# Altium PCB BM Dev Cells.PcbDoc
Units mm, origin at the board's own origin, x right, y up, seen from the top; angles counter-clockwise.
Board outline 113.77 x 88.64 mm, 2 copper layers (TOP Copper, BOT Copper), stack 1.544 mm thick; 26 components, 10 nets, 71 pads, 5 vias.
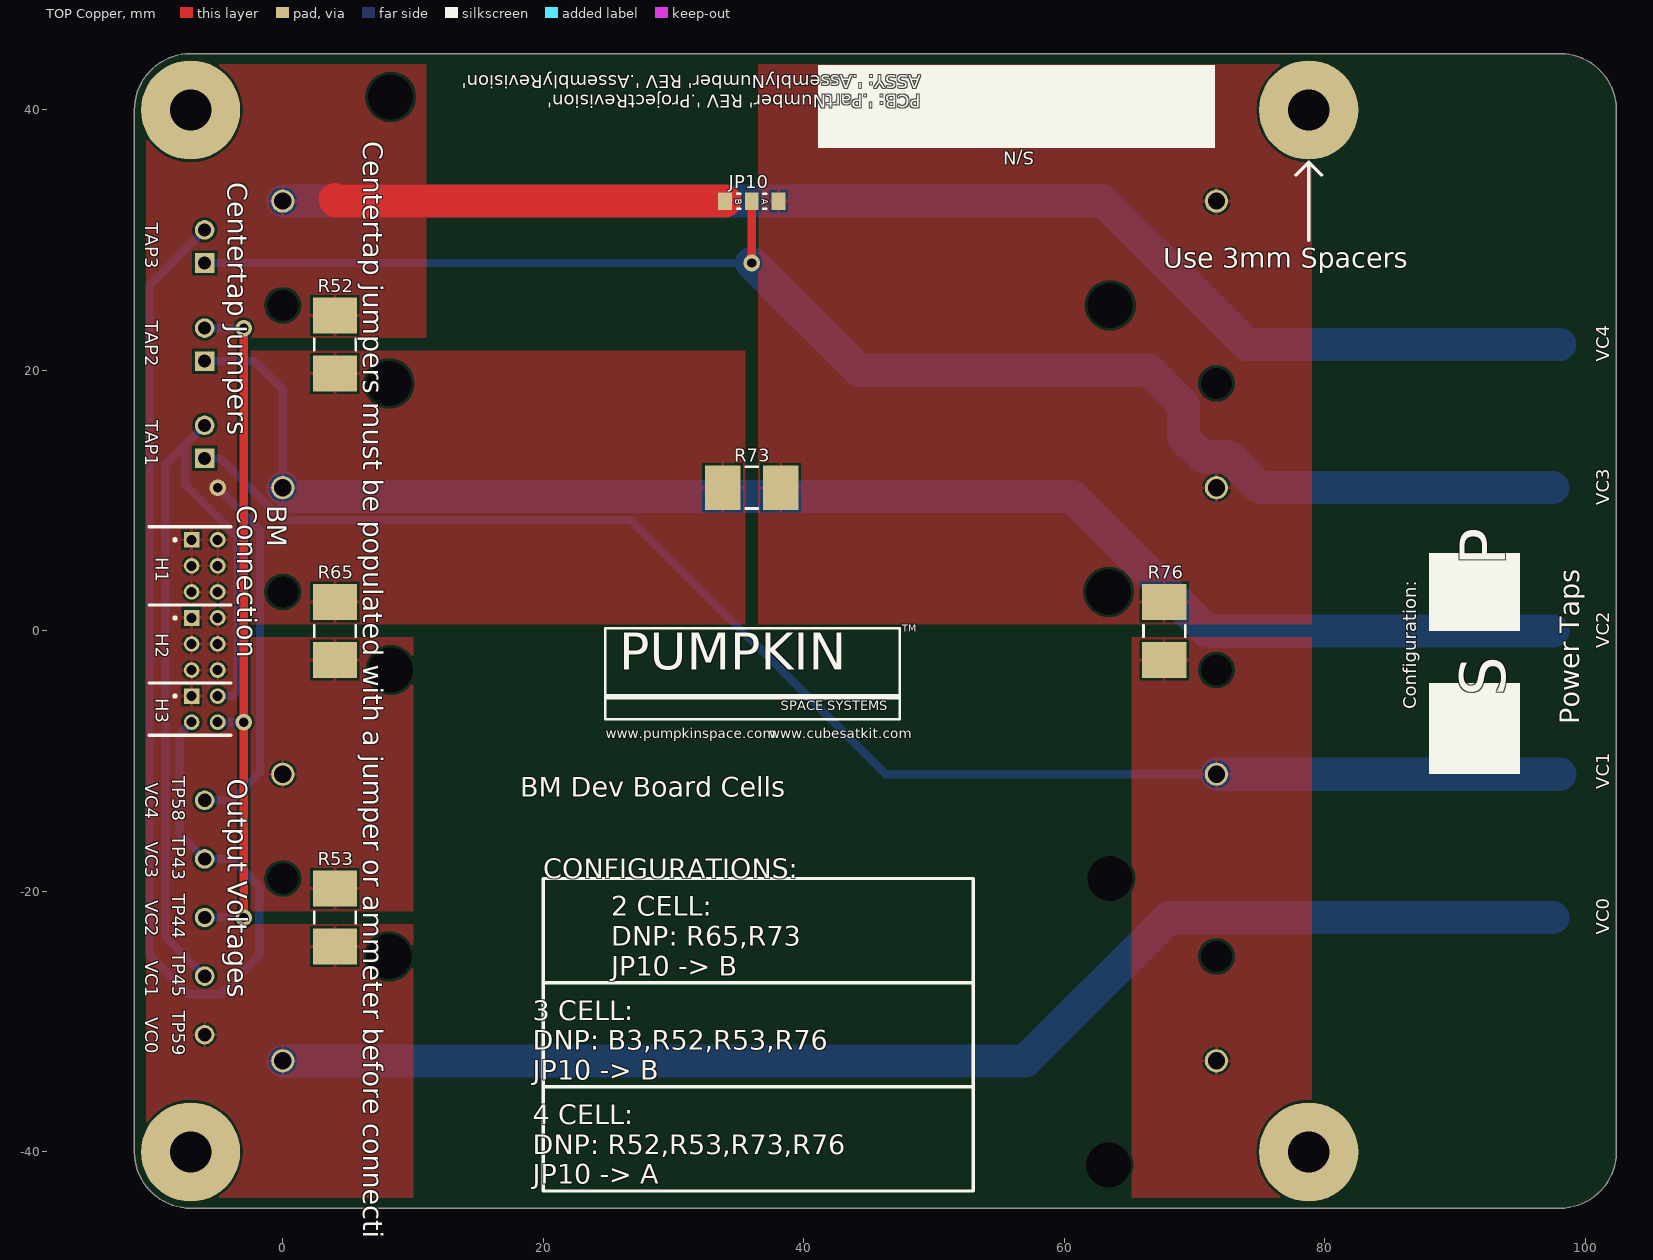
[diagram p0: TOP Copper view]
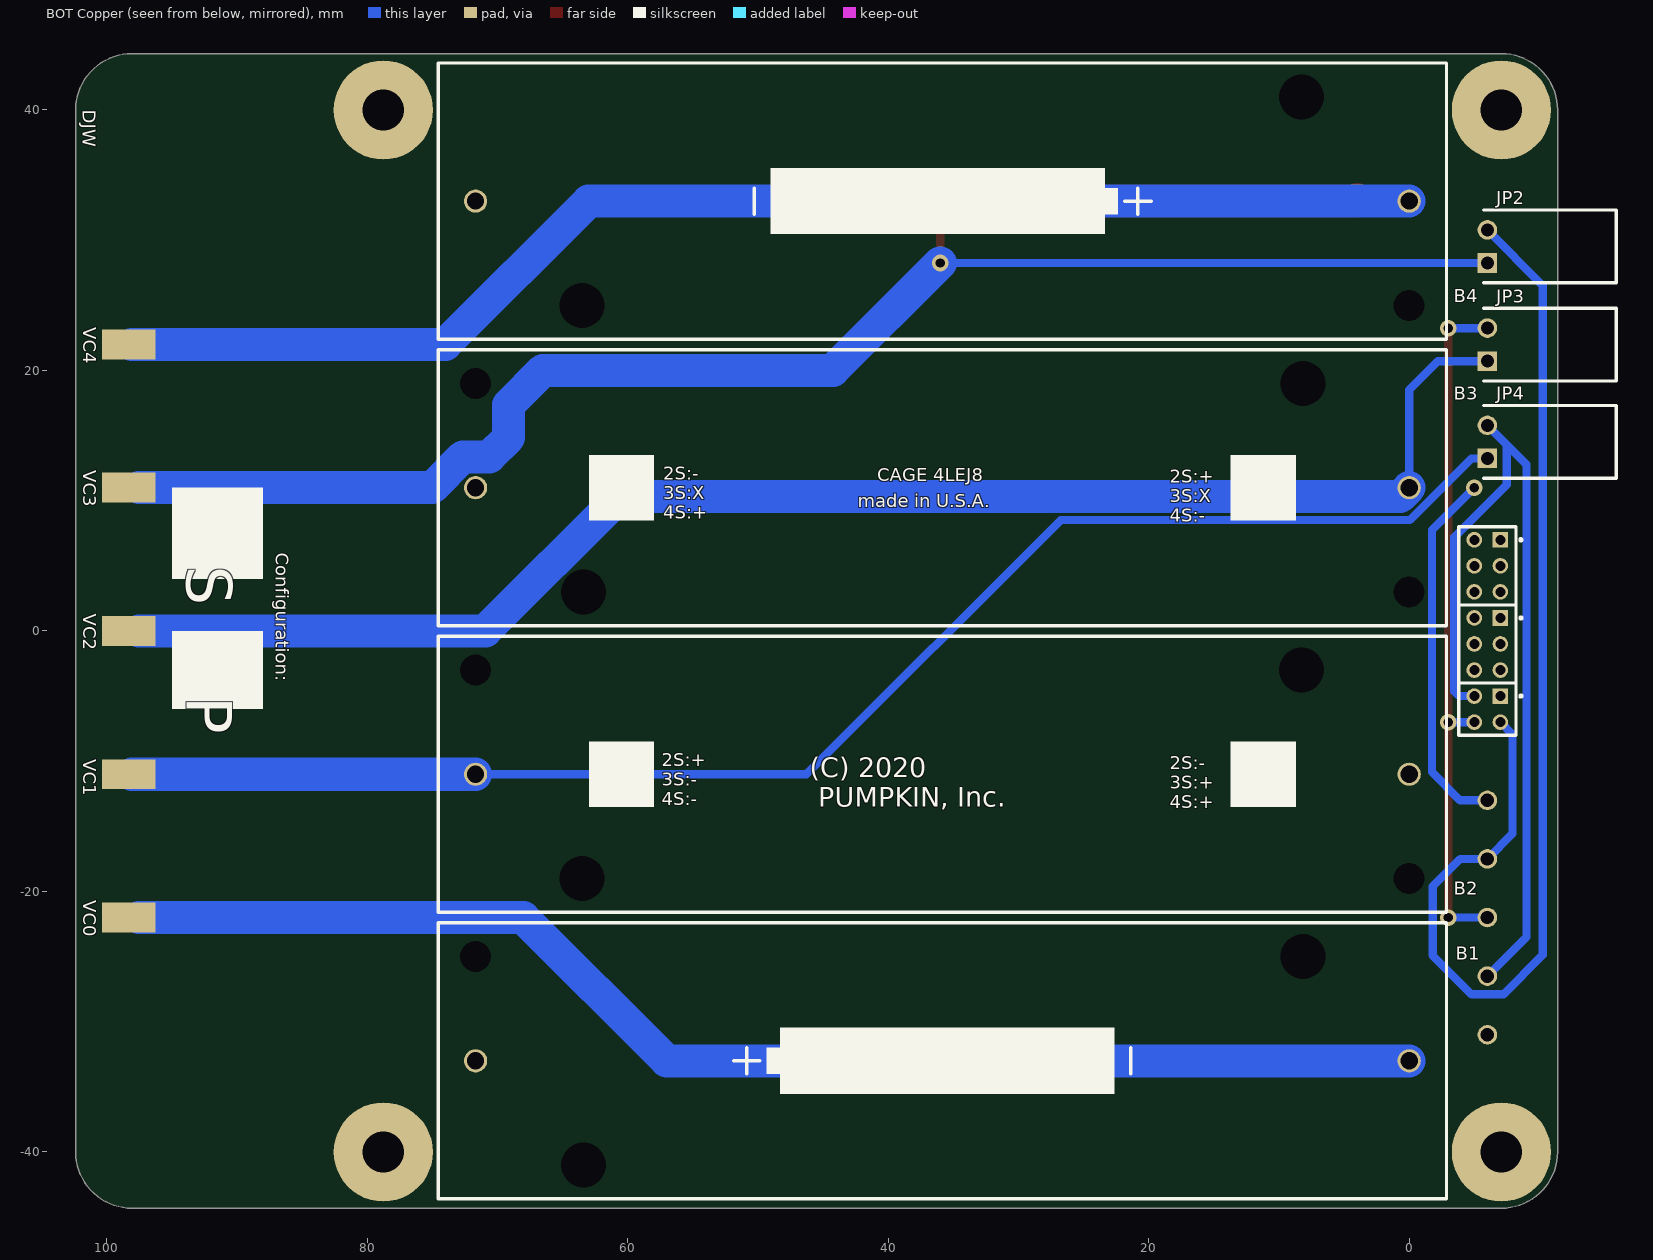
[diagram p1: BOT Copper view, seen from below]
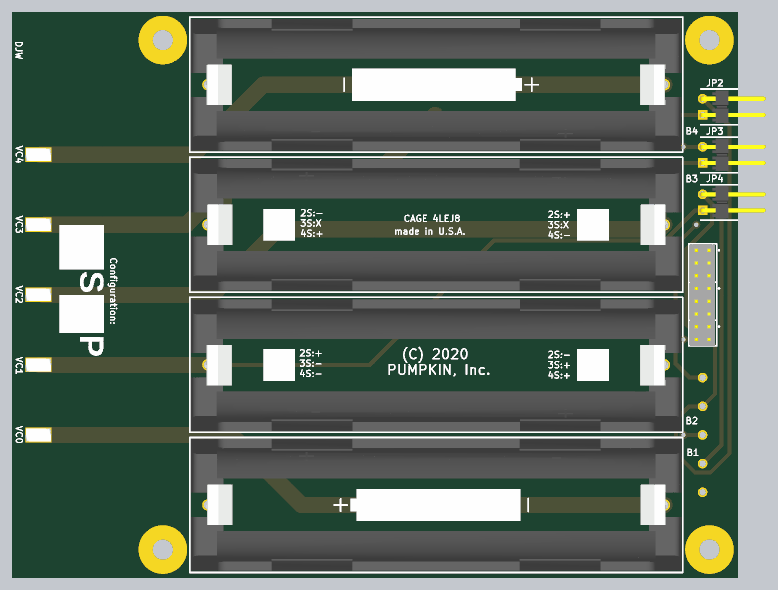
[diagram p2: 3D render of the assembled board from below, using the file's embedded part models]

## Layer stack, top to bottom
Top Solder: solder mask 0.0102, Solder Resist, Dk 3.5
TOP Copper: signal copper 0.0356
Dielectric 3: prepreg 1.4732, Dk 4.2
BOT Copper: signal copper 0.0356
Bottom Solder: solder mask 0.0102, Solder Resist, Dk 3.5

## Board outline
-7.079,-44.318 cw(c-7.079,-40) -11.397,-40 -11.397,40 cw(c-7.079,40) -7.079,44.318 98.058,44.318 cw(c98.058,40) 102.376,40 102.376,-40 cw(c98.058,-40) 98.058,-44.318

## Design rules (kind name [scope] priority, off if disabled: settings)
Clearance Clearance_1 [HasFootprint('Spark_Gap') vs inPolygon] p1: gap=0.203 ignorepadtopadclearanceinfootprint=FALSE except(0: Arc-Hole Track-Hole SMDPad-Hole THPad-Hole Via-Hole Fill-Hole Poly-Hole Region-Hole Text-Hole)
Clearance Clearance_3 [HasFootprint('Spark_Gap')] p2: gap=0.152 ignorepadtopadclearanceinfootprint=FALSE except(0: Arc-Hole Track-Hole SMDPad-Hole THPad-Hole Via-Hole Fill-Hole Poly-Hole Region-Hole Text-Hole)
Clearance Clearance_2 [InNet('BAT_POS')   and not      HasFootprint('Spark_Gap')] p3: gap=0.203 ignorepadtopadclearanceinfootprint=FALSE except(0: Arc-Hole Track-Hole SMDPad-Hole THPad-Hole Via-Hole Fill-Hole Poly-Hole Region-Hole Text-Hole)
Clearance Polygon_Clearence [All vs OnLayer('Keep-Out Layer')] p4: gap=0.254 ignorepadtopadclearanceinfootprint=FALSE except(0: Arc-Hole Track-Hole SMDPad-Hole THPad-Hole Via-Hole Fill-Hole Poly-Hole Region-Hole Text-Hole)
Clearance [All] p5: gap=0.203 ignorepadtopadclearanceinfootprint=FALSE except(0: Arc-Hole Track-Hole SMDPad-Hole THPad-Hole Via-Hole Fill-Hole Poly-Hole Region-Hole Text-Hole)
ComponentClearance ComponentClearance_MTMM [HasFootprint('MTMM-103-03-S-D-243') vs HasFootprint('MTMM-102-02-S-D-196')] p1: gap=0 collisioncheckmode=3 verticalgap=0.254 showdistances=FALSE
ComponentClearance [All] p2: gap=0.254 collisioncheckmode=3 verticalgap=0.05 showdistances=FALSE
HoleSize [All] p1: absolutevalues=TRUE maxlimit=8 minlimit=0.025 maxpercent=80.000 minpercent=20.000
MinimumSolderMaskSliver [All] p1: minsoldermaskwidth=0.152
PolygonConnect PolygonConnect_1 [(InPadClass('Power'))or isVia   or HasFootprint('Spark_Gap')] p1: connectstyle=Direct reliefconductorwidth=0.254 reliefentries=4 polygonreliefangle="90 Angle" airgapwidth=0.254
PolygonConnect [All] p2: connectstyle=Relief reliefconductorwidth=0.254 reliefentries=4 polygonreliefangle="90 Angle" airgapwidth=0.18
RoutingVias [All] p1: holewidth=0.2 width=0.5 viastyle="Through Hole" minholewidth=0.127 minwidth=0.4 maxholewidth=6 maxwidth=8
SilkToSilkClearance [All] p1: silktosilkclearance=0
SilkToSolderMaskClearance [IsPad] p1: minsilkscreentomaskgap=0 clearancetoexposedcopper=TRUE
SolderMaskExpansion [All] p1: expansion=0 istentingtop=FALSE
Width [All] p1: maxlimit=2.54 minlimit=0.203 preferedwidth=0.254 minimp=50.000000 maximp=50.000000 favimp=50.000000
25 further rules are at their usual default settings.

## Components (designator, comment, footprint, x,y, rotation, side; value= is the part's Value field where it differs from the comment)
B1 "1043" 1043 35.839,-33 r270 bottom
B2 "1043" "1043 - non-polar" 35.839,-11 r90 bottom
B3 "1043" "1043 - non-polar" 35.839,11 r270 bottom
B4 "1043" 1043 35.839,33 r90 bottom
H1 "MTMM-103-03-S-D-243" MTMM-103-03-S-D-243 -6,5 r0 top
H2 "MTMM-103-03-S-D-243" MTMM-103-03-S-D-243 -6,-1 r0 top
H3 "MTMM-102-02-S-D-196" MTMM-102-02-S-D-196 -6,-6 r0 top
JP2 "TSW-102-08-L-S-RA" HDR1X2HTH -6,29.52 r90 bottom
JP3 "TSW-102-08-L-S-RA" HDR1X2HTH -6,21.98 r90 bottom
JP4 "TSW-102-08-L-S-RA" HDR1X2HTH -6,14.52 r90 bottom
JP10 "Jumper" "0805 RES 2 way jumper" 37.025,33 r180 top
R52 "0R" "2512 RES" 4,22 r270 top
R53 "0R" "2512 RES" 4,-22 r90 top
R65 "0R" "2512 RES" 4,0 r90 top
R73 "0R" "2512 RES" 36,11 r180 top
R76 "0R" "2512 RES" 67.679,0 r90 top
TP43 "Testpoint" Testpoint -6,-17.5 r90 top
TP44 "Testpoint" Testpoint -6,-22 r90 top
TP45 "Testpoint" Testpoint -6,-26.5 r90 top
TP58 "Testpoint" Testpoint -6,-13 r90 top
TP59 "Testpoint" Testpoint -6,-31 r90 top
VC0 "Hook" Hook 98.3,-22 r344 bottom
VC1 "Hook" Hook 98.3,-11 r344 bottom
VC2 "Hook" Hook 98.3,0 r344 bottom
VC3 "Hook" Hook 98.3,11 r344 bottom
VC4 "Hook" Hook 98.3,22 r344 bottom

## Footprints (in the part's own frame and the unit in brackets; to place one, negate y for a bottom-side part, rotate by r counter-clockwise, add the part's x,y. Pads: shape width x height; smd on the part's side, far side on the other; paste and mask are expansions set on the pad)
"0805 RES 2 way jumper" [mm] "Chip Resistor, 2-Leads, Body 2.05x1.25mm, IPC Medium Density"
  rect 1.05x1.35 smd: 1(-1.025,0) 2(1.025,0) 3(3.075,0)
  silkscreen extent -0.07,-0.58 2.13,0.58
1043 [mil]
  round 70 hole 52: 1(0,-1411) 2(0,1411)
  round 39.37 hole 94 unplated: NC(-315,-1411)
  round 39.37 hole 136 unplated: NC(-315,1090) NC(315,-1085)
  silkscreen extent -417,-1524 417,1524, body extent -408,-1516 405,1518, height 587
"1043 - non-polar" [mil]
  round 70 hole 52: 1(0,-1411) 2(0,1411)
  round 39.37 hole 94: NC(-315,-1411) NC(315,1411)
  round 39.37 hole 136: NC(-315,1090) NC(315,-1085)
  silkscreen extent -417,-1524 417,1524, body extent -408,-1516 405,1518, height 587
"2512 RES" [mm] "Chip Resistor, 2-Leads, Body 6.30x3.20mm, IPC Medium Density"
  rect 2.75x3.4 smd paste-2: 1(-2.225,0) 2(2.225,0)
  silkscreen extent -0.45,-1.6 0.45,1.6, body extent -3.25,-1.7 3.25,1.7, height 0.8
HDR1X2HTH [mm] "Connector; Header; 3 Position; Right Angle. Through hole"
  rect 1.5x1.5 hole 1: 1(-1.27,0)
  round 1.5 hole 1: 2(1.27,0)
  silkscreen extent -2.79,-9.9 2.79,0.3, body extent -2.54,-9.91 2.54,0.32, height 3.07
Hook [mm]
  rect 4.1x2.3 smd rot 164 paste-0.3: 1(0,0)
  body extent -2.24,-1.52 2.25,1.53, height 2.3
MTMM-102-02-S-D-196 [mm]
  rect 1.2x1.2 hole 0.762: 1(-1,1)
  round 1.2 hole 0.762: 2(1,1) 3(-1,-1) 4(1,-1)
  silkscreen extent -2.38,0.9 -2.18,1.1, body extent -1.97,-2 1.97,2, height 1.55
MTMM-103-03-S-D-243 [mm]
  rect 1.2x1.2 hole 0.762: 1(-1,2)
  round 1.2 hole 0.762: 2(1,2) 3(-1,0) 4(1,0) 5(-1,-2) 6(1,-2)
  silkscreen extent -2.38,1.9 -2.18,2.1, body extent -1.97,-3 1.97,3, height 1.55
Testpoint [mm]
  round 1.5 hole 1.02: 1(0,0)

## Part data
B1 B2 B3 B4: "Battery 18650 Holder", Supplier Part Number 1=36-1043-ND, Supplier 1=Digi-Key, Supplier 2=Mouser, Supplier Part Number 2=534-1043
H1 H2: "Header 3x2 TH thru-board 2mm", Supplier Part Number 1=MTMM-103-03-G-D-243-ND, Supplier 1=Digi-Key, Supplier 2=Digi-Key, Supplier Part Number 2=MTMM-103-03-G-D-000-ND
H3: "Header 2x2 TH thru-board 2mm", Supplier Part Number 1=MTMM-102-02-S-D-196-ND, Supplier 1=Digi-Key, Supplier 2=Digi-Key, Supplier Part Number 2=MTMM-102-02-G-D-196-ND
JP2 JP3 JP4: "Header 2x1 RA TH", Supplier Part Number 1=SAM1043-02-ND, Supplier 1=Digi-Key, Supplier 2=Digi-Key, Supplier 3=Digi-Key, Supplier 4=Digi-Key, Supplier Part Number 2=SAM10325-ND, Supplier Part Number 3=HTSW-102-08-G-S-RA-ND, Supplier Part Number 4=SAM1039-02-ND
JP10: library part "Jumper 2 way 0805", "Jumper 0805 2 pos", Supplier Part Number 1=P0.0ACT-ND, Supplier 1=Digi-Key, Supplier 2=Digi-Key, Supplier Part Number 2=311-0.0CRCT-ND
R52 R53 R65 R73 R76: library part "Resistor 0R 2512", "Resistor 0R 2512 1W", Supplier Part Number 1=YAG1232CT-ND, Revision="Altium ETH 11-03.2008", Supplier 1=Digi-Key, Supplier 2=Digi-Key, Supplier 3=Digi-Key, Supplier Part Number 2=RMCF2512ZT0R00CT-ND, Supplier Part Number 3=1276-6000-1-ND
TP43 TP44 TP45 TP58 TP59: Supplier Part Number 1=36-5002-ND, Supplier 1=Digi-Key, Supplier 2=Digi-Key, Supplier Part Number 2=36-5001-ND
VC0 VC1 VC2 VC3 VC4: "Testpoint Hook", Manufacturer="Keystone Electronics", Manufacturer Part Number=5016, Supplier Part Number 1=36-5016CT-ND, Supplier 1=Digi-Key, Supplier 1 Pricing="0.60 (NZD)", Supplier 2=Digi-Key, Supplier Part Number 2=36-5018CT-ND

## Free pads (board coordinates)
  round 7.62 hole 3.175: ""(-7.079,-40) ""(-7.079,40) ""(78.758,-40) ""(78.758,40)

## Via types
v1: diameter 1.27, hole 0.711, TOP Copper to BOT Copper, tented both sides, 5 vias

## Nets (pads, with @x,y where several pads share a name; then routed paths per layer and width w, separated by ;. In a path a pad name is that pad's centre, name@x,y a point inside that pad or via, vN(x,y) a via of type N, cw(c..) or ccw(c..) an arc to the next point about the centre after c; other vN are vias at no path point)
CELL_TAP_1: B1.1 B2.2 JP4.1 R76.1 VC1.1 | length 114.1
  BOT Copper w0.635: JP4.1 -4.782,13.25 -0.051,8.519 26.746,8.519 46.265,-11 B2.2
  BOT Copper w2.54: B2.2 VC1.1@98.058,-11
CELL_TAP_2: B3.2 JP3.1 R52.2 R65.2 R73.2 VC2.1 | length 116.5
  BOT Copper w0.635: JP3.1 -2.21,20.71 0,18.5 B3.2
  BOT Copper w2.54: B3.2 0.69,10.31 60.614,10.31 70.923,0 VC2.1@97.52,0
CELL_TAP_3: JP2.1 JP10.2 VC3.1 | length 116.9
  TOP Copper w0.635: v1(36,28.25) JP10.2
  BOT Copper w0.635: JP2.1 v1(36,28.25)
  BOT Copper w2.54: v1(36,28.25) 44.25,20 66.5,20 69.139,17.361 69.139,14.85 70.627,13.362 72.657,13.362 75.019,11 VC3.1@97.52,11
NetB2_1: B2.1 R53.2 R65.1
NetB3_1: B3.1 B4.2 JP10.1 R73.1 R76.2
VC_0: B1.2 H2.1 H2.2 H2.3 H2.4 H2.5 H2.6 H3.1 R53.1 TP59.1 VC0.1 | length 102.1
  BOT Copper w2.54: B1.2 57,-33 68,-22 VC0.1@97.52,-22
VC_1: H3.2 JP4.2 TP45.1 | length 67.1
  BOT Copper w0.635: TP45.1 -9,-23.5 -9,12.79 -7.5,14.29 ; JP4.2 -7.5,14.29 ; H3.2 -3.827,-5 -3.455,-4.628 -3.455,7.185 -7.5,11.231 -7.5,14.29
VC_2: H3.4 JP3.2 TP44.1 | length 53.3
  TOP Copper w0.635: v1(-3,-22) v1(-3,-7) v1(-3,23.25)
  BOT Copper w0.635: TP44.1 v1(-3,-22) ; JP3.2 v1(-3,23.25) ; H3.4 v1(-3,-7)
VC_3: H3.3 JP2.2 TP43.1 | length 90.4
  BOT Copper w0.635: H3.3 -7.937,-7.937 -7.937,-15.563 TP43.1 -3.919,-17.5 -1.8,-19.619 -1.8,-24.9 -4.8,-27.9 -7.234,-27.9 -10.25,-24.884 -10.25,26.54 JP2.2
VC_4: B4.1 H1.1 H1.2 H1.3 H1.4 H1.5 H1.6 JP10.3 R52.1 TP58.1 VC4.1 | length 160.9
  TOP Copper w2.54: 4,33.127 4.127,33 JP10.3
  BOT Copper w0.635: TP58.1 -3.919,-13 -1.752,-10.833 -1.752,7.752 v1(-5,11)
  BOT Copper w2.54: B4.1 63,33 74,22 VC4.1@98.058,22
pads on no net: B1.NC B2.NC B3.NC B4.NC

## Polygon pours and split planes (outlines as drawn)
VC_4 on TOP Copper "TOP_COPPER_VC_4_P006" (solid, pour order 6): 11,22.5 11,43.5 -10.5,43.5 -10.5,2.092 -3.5,2.092 -3.5,22.5
VC_0 on TOP Copper "TOP_COPPER_VC_0_P005" (solid, pour order 5): 10,-22.5 10,-43.5 -10.5,-43.5 -10.5,1.9 -3.5,1.9 -3.5,-22.5
CELL_TAP_1 on TOP Copper "TOP_COPPER_CELL_TAP_1_P003" (solid, pour order 3): 79,-43.5 65.179,-43.5 65.179,-0.5 79,-0.5
NetB3_1 on TOP Copper "TOP_COPPER_NETB3_1_P002" (solid, pour order 2): 79,0.5 36.5,0.5 36.5,43.5 79,43.5
CELL_TAP_2 on TOP Copper "TOP_COPPER_CELL_TAP_2_P001" (solid, pour order 1): -2.5,21.5 35.5,21.5 35.5,0.5 -2.5,0.5
NetB2_1 on TOP Copper "TOP_COPPER_NETB2_1_P000" (solid, pour order 0): -2.5,-0.5 10,-0.5 10,-21.5 -2.5,-21.5

## Other copper
TOP Copper:
  text "Layer 1 (TOP)" at 167.055,-59.64 h5
BOT Copper:
  text "Layer 2 (BOTTOM)" at 166.987,-59.68 h5

## Silkscreen, mask and mechanical layers (free items; w line width, h text height)
Top Overlay:
  region: 95,6 88,6 88,0 95,0
  region: 95,-4 88,-4 88,-11 95,-11
  region: 41.094,43.44 41.094,37.09 71.574,37.09 71.574,43.44
  lines w0.203: 24.756,-5.145 47.362,-5.145 ; 24.756,-4.942 47.362,-4.942 ; 24.756,-6.771 47.362,-6.771 47.362,0.214 24.756,0.214 24.756,-6.771
  lines w0.254: -10.25,-8 -4,-8 ; -10.25,-4 -4,-4 ; -10.25,2 -4,2 ; -10.25,8 -4,8 ; 20,-35 53,-35 ; 20,-26.999 53,-26.999 ; 77.758,35 78.758,36 ; 78.758,30 78.758,36 ; 79.758,35 78.758,36 ; 53,-27 53,-26.999 ; 20,-43 20,-19 53,-19 53,-43 20,-43
  text "PCB: '.PartNumber' REV '.ProjectRevision' / ASSY: '.AssemblyNumber' REV '.AssemblyRevision'" at 48.99,42.662 h1 r180
  text "Centertap jumpers must be populated with a jumper or ammeter before connecting Dev Board" at 6.182,37.6 h1.52 r270
  text "S/N" at 57.692,36.807 h1 r180
  text "Centertap Jumpers" at -4.238,34.442 h1.52 r270
  text "TAP3" at -10.55,31.333 h1 r270
  text "Use 3mm Spacers" at 67.601,27.892 h1.52
  text "TAP2" at -10.55,23.833 h1 r270
  text "VC4" at 101.85,20.667 h1 r90
  text "TAP1" at -10.55,16.166 h1 r270
  text "VC3" at 101.85,9.667 h1 r90
  text "BM / Connection" at -3.5,9.649 h1.52 r270
  text "P" at 95,5 h6 r90
  text "TM" at 47.575,-0.265 h0.89
  text "VC2" at 101.85,-1.333 h1 r90
  text "PUMPKIN" at 25.848,-3.9 h4.83
  text "S" at 95,-5 h6 r90
  text "Configuration:" at 87,-6 h1 r90
  text "SPACE SYSTEMS" at 38.218,-6.364 h1.27
  text "Power Taps" at 99.538,-7.149 h1.52 r90
  text "www.pumpkinspace.com" at 24.781,-8.218 h0.76
  text "www.cubesatkit.com" at 37.329,-8.218 h0.76
  text "Output Voltages" at -4.238,-11.335 h1.52 r270
  text "VC4" at -10.55,-11.667 h1 r270
  text "VC1" at 101.85,-12.166 h1 r90
  text "BM Dev Board Cells" at 18.21,-12.722 h1.52
  text "VC3" at -10.55,-16.167 h1 r270
  text "CONFIGURATIONS:" at 20,-19 h1.52
  text "VC2" at -10.55,-20.667 h1 r270
  text "VC0" at 101.85,-23.333 h1 r90
  text "VC1" at -10.55,-25.334 h1 r270
  text "2 CELL: / DNP: R65,R73 / JP10 -> B" at 25.203,-26.454 h1.52
  text "VC0" at -10.55,-29.667 h1 r270
  text "3 CELL: / DNP: B3,R52,R53,R76 / JP10 -> B" at 19.203,-34.454 h1.52
  text "4 CELL: / DNP: R52,R53,R73,R76 / JP10 -> A" at 19.203,-42.454 h1.52
  text "Top Silkscreen" at 166.987,-59.68 h5
Bottom Overlay:
  region: 95,11 88,11 88,4 95,4
  region: 95,0 88,0 88,-6 95,-6
  text "DJW" at 101.85,40 h1 r90
  text "CAGE 4LEJ8" at 40.832,11.5 h1
  text "made in U.S.A." at 42.331,9.5 h1
  text "2S:- / 3S:X / 4S:+" at 57.25,8.621 h1
  text "2S:+ / 3S:X / 4S:-" at 18.399,8.371 h1
  text "Configuration:" at 87,6 h1 r90
  text "S" at 95,5 h6 r90
  text "P" at 95,-5 h6 r90
  text "2S:+ / 3S:- / 4S:-" at 57.399,-13.379 h1
  text "(C) 2020 /  PUMPKIN, Inc." at 46.03,-13.514 h1.52
  text "2S:- / 3S:+ / 4S:+" at 18.399,-13.629 h1
  text "Bottom Silkscreen" at 42.527,-59.68 h5
Top Paste:
  text "Top Solder Paste" at 166.987,-59.68 h5
Bottom Paste:
  text "Bottom Solder Paste" at 166.987,-59.68 h5
Top Solder:
  text "Top Soldermask" at 166.987,-64.76 h5
Bottom Solder:
  text "Bottom Soldermask" at 42.527,-64.76 h5
  text "Bottom Soldermask" at 166.987,-64.76 h5
Board:
  the board outline again, w0.254
Fab Notes:
  text "FABRICATION NOTES: / ---------------------------------------------------- / 1.  ALL DIMENSIONS IN INCHES / 2.  SCALE IS 1:1 / 4.  SMOBC BOTH SIDES. COLOR: GREEN / 5.  SOLDERMASK IS LPI, SEMI-GLOSS FINISH / 6.  SILKSCREEN LEGEND WHITE / 7.  SILKSCREEN TOP AND BOTTOM / 8.  FINAL BOARD THICKNESS = 0.062\" / 9.  FINAL COPPER THICKNESS = 1oz / 10. 2 CIRCUIT LAYERS / 11. MINIMUM SPACING 0.007\" / 12. MINIMUM SMD PITCH IS 0.020\" / 13. SURFACEMOUNT  COMPONENTS TOP AND BOTTOM / 14. DO NOT ADD TOOLING HOLES / 16. NUMBER OF SMD PADS: 18 / 17. NUMBER OF HOLES: '.Hole_Count' / 18. SMALLEST HOLE IS 0.3mm" at 120.561,-29.453 h4
  text "Mechanical Drawing" at 166.987,-59.68 h5
Rigid PCB Outline:
  text "Rigid PCB Outline" at 166.987,-59.68 h5
Flex PCB Outline:
  text "Flex PCB Outline" at 167,-59.75 h5
Drill Drawing:
  circle w0.254: c-10.815,92.365 r0.847
  lines w0.254: -11.662,76.702 -11.238,76.702 -11.238,76.278 -10.392,76.278 -10.392,76.702 -9.968,76.702 -9.968,77.548 -10.392,77.548 -10.392,77.972 -11.238,77.972 -11.238,77.548 -11.662,77.548 -11.662,76.702 ; -11.662,81.782 -9.968,81.782 -10.815,80.088 -11.662,81.782 ; -11.662,87.708 -10.815,88.132 -9.968,87.708 -10.392,88.555 -9.968,89.402 -10.815,88.978 -11.662,89.402 -11.238,88.555 -11.662,87.708 ; -11.662,95.752 -11.238,95.752 -10.815,95.328 -10.392,95.752 -9.968,95.752 -10.392,96.175 -9.968,96.598 -10.392,96.598 -10.815,97.022 -11.238,96.598 -11.662,96.598 -11.238,96.175 -11.662,95.752 ; -11.662,102.948 -9.968,102.948 -9.968,104.642 -11.662,104.642 -11.662,102.948 ; -11.662,106.758 -11.662,107.182 -11.238,107.605 -11.662,108.028 -11.662,108.452 -11.238,108.452 -10.815,108.028 -10.392,108.452 -9.968,108.452 -9.968,108.028 -10.392,107.605 -9.968,107.182 -9.968,106.758 -10.392,106.758 -10.815,107.182 -11.238,106.758 -11.662,106.758 ; -11.662,111.415 -10.815,110.568 -9.968,111.415 -10.815,112.262 -11.662,111.415
  lines w0.381: -13.181,75.135 129.173,75.135 ; -13.181,113.235 129.173,113.235 ; 0.812,71.325 0.812,117.045 ; 14.524,71.325 14.524,117.045 ; 43.726,71.325 43.726,117.045 ; 56.575,71.325 56.575,117.045 ; 75.213,71.325 75.213,117.045 ; 97.204,71.325 97.204,117.045 ; -13.181,71.325 129.173,71.325 129.173,117.045 -13.181,117.045 -13.181,71.325
  text "Symbol" at -10.895,114.378 h1.83
  text "Count" at 1.955,114.378 h1.83
  text "Hole Size" at 15.667,114.378 h1.83
  text "Plated" at 44.869,114.378 h1.83
  text "Hole Type" at 57.718,114.378 h1.83
  text "Hole Length" at 76.356,114.378 h1.83
  text "Rout Path Length" at 98.347,114.378 h1.83
  text "5" at 1.955,110.568 h1.52
  text "28.00mil (0.711mm)" at 15.667,110.568 h1.52
  text "PTH" at 44.869,110.568 h1.52
  text "Round" at 57.718,110.568 h1.52
  text "-" at 76.356,110.568 h1.52
  text "-" at 98.347,110.568 h1.52
  text "16" at 1.955,106.758 h1.52
  text "30.00mil (0.762mm)" at 15.667,106.758 h1.52
  text "PTH" at 44.869,106.758 h1.52
  text "Round" at 57.718,106.758 h1.52
  text "-" at 76.356,106.758 h1.52
  text "-" at 98.347,106.758 h1.52
  text "6" at 1.955,102.948 h1.52
  text "39.37mil (1.000mm)" at 15.667,102.948 h1.52
  text "PTH" at 44.869,102.948 h1.52
  text "Round" at 57.718,102.948 h1.52
  text "-" at 76.356,102.948 h1.52
  text "-" at 98.347,102.948 h1.52
  text "5" at 1.955,99.138 h1.52
  text "40.16mil (1.020mm)" at 15.667,99.138 h1.52
  text "PTH" at 44.869,99.138 h1.52
  text "Round" at 57.718,99.138 h1.52
  text "-" at 76.356,99.138 h1.52
  text "-" at 98.347,99.138 h1.52
  text "P" at -11.633,98.885 h1.69
  text "8" at 1.955,95.328 h1.52
  text "52.00mil (1.321mm)" at 15.667,95.328 h1.52
  text "PTH" at 44.869,95.328 h1.52
  text "Round" at 57.718,95.328 h1.52
  text "-" at 76.356,95.328 h1.52
  text "-" at 98.347,95.328 h1.52
  text "2" at 1.955,91.518 h1.52
  text "94.00mil (2.388mm)" at 15.667,91.518 h1.52
  text "NPTH" at 44.869,91.518 h1.52
  text "Round" at 57.718,91.518 h1.52
  text "-" at 76.356,91.518 h1.52
  text "-" at 98.347,91.518 h1.52
  text "4" at 1.955,87.708 h1.52
  text "94.00mil (2.388mm)" at 15.667,87.708 h1.52
  text "PTH" at 44.869,87.708 h1.52
  text "Round" at 57.718,87.708 h1.52
  text "-" at 76.356,87.708 h1.52
  text "-" at 98.347,87.708 h1.52
  text "4" at 1.955,83.898 h1.52
  text "125.00mil (3.175mm)" at 15.667,83.898 h1.52
  text "PTH" at 44.869,83.898 h1.52
  text "Round" at 57.718,83.898 h1.52
  text "-" at 76.356,83.898 h1.52
  text "-" at 98.347,83.898 h1.52
  text "T" at -11.633,83.645 h1.69
  text "4" at 1.955,80.088 h1.52
  text "136.00mil (3.454mm)" at 15.667,80.088 h1.52
  text "NPTH" at 44.869,80.088 h1.52
  text "Round" at 57.718,80.088 h1.52
  text "-" at 76.356,80.088 h1.52
  text "-" at 98.347,80.088 h1.52
  text "4" at 1.955,76.278 h1.52
  text "136.00mil (3.454mm)" at 15.667,76.278 h1.52
  text "PTH" at 44.869,76.278 h1.52
  text "Round" at 57.718,76.278 h1.52
  text "-" at 76.356,76.278 h1.52
  text "-" at 98.347,76.278 h1.52
  text "58 Total" at 1.955,72.468 h1.52
  text "Drill Drawing" at 166.987,-64.76 h5
Title Block:
  lines w0.203: 103.246,-57.226 125.852,-57.226 ; 103.246,-57.023 125.852,-57.023 ; 103.246,-58.852 103.246,-51.867 125.852,-51.867 125.852,-58.852 103.246,-58.852
  lines w0.254: 131.427,-67.3 131.427,-46.98 238.107,-46.98 ; 131.427,-54.6 238.107,-54.6 ; 161.907,-67.3 161.907,-46.98 ; -28.593,-67.3 238.107,-67.3 238.107,135.9 -28.593,135.9 -28.593,-67.3
  text "Part Number" at 133.967,-52.06 h5
  text "'.PartNumber''.ProjectRevision'" at 166.987,-52.06 h5
  text "TM" at 126.065,-52.347 h0.89
  text "PUMPKIN" at 104.338,-55.982 h4.83
  text "SPACE SYSTEMS" at 116.708,-58.445 h1.27
  text "Layers:" at 133.967,-59.68 h5
  text "www.pumpkinspace.com" at 103.271,-60.3 h0.76
  text "www.cubesatkit.com" at 115.819,-60.3 h0.76
Title Block Flipped:
  lines w0.203: 83.663,-57.226 106.269,-57.226 ; 83.663,-57.023 106.269,-57.023 ; 83.663,-58.852 83.663,-51.867 106.269,-51.867 106.269,-58.852 83.663,-58.852
  lines w0.254: -28.593,-54.6 78.087,-54.6 ; -28.593,-46.98 78.087,-46.98 78.087,-67.3 ; 47.607,-67.3 47.607,-46.98 ; -28.593,-67.3 238.107,-67.3 238.107,135.9 -28.593,135.9 -28.593,-67.3
  text "'.PartNumber''.ProjectRevision'" at 42.527,-52.06 h5
  text "Part Number" at 75.547,-52.06 h5
  text "TM" at 83.45,-52.347 h0.89
  text "PUMPKIN" at 105.177,-55.982 h4.83
  text "SPACE SYSTEMS" at 92.807,-58.445 h1.27
  text "Layers:" at 75.547,-59.68 h5
  text "www.cubesatkit.com" at 93.696,-60.3 h0.76
  text "www.pumpkinspace.com" at 106.243,-60.3 h0.76

## Dimensions
98.058,44.318 to 98.058,-44.318 on Fab Notes
-11.397,40 to 102.376,40 on Fab Notes

## Text inside footprints (layer, text, board x,y; h text height)
JP10: Top Overlay "A" at 36.787,33.178 h0.5 r270; Top Overlay "B" at 34.73,33.178 h0.5 r270